# Altium PCB esc.PcbDoc (part 3 of 3)
Units mm, origin at the board's own origin, x right, y up, seen from the top; angles counter-clockwise.
Board outline 31 x 31 mm, 4 copper layers (Top Layer, Ground, Power, Bottom Layer), stack 0.971 mm thick; 336 components, 195 nets, 854 pads, 360 vias.
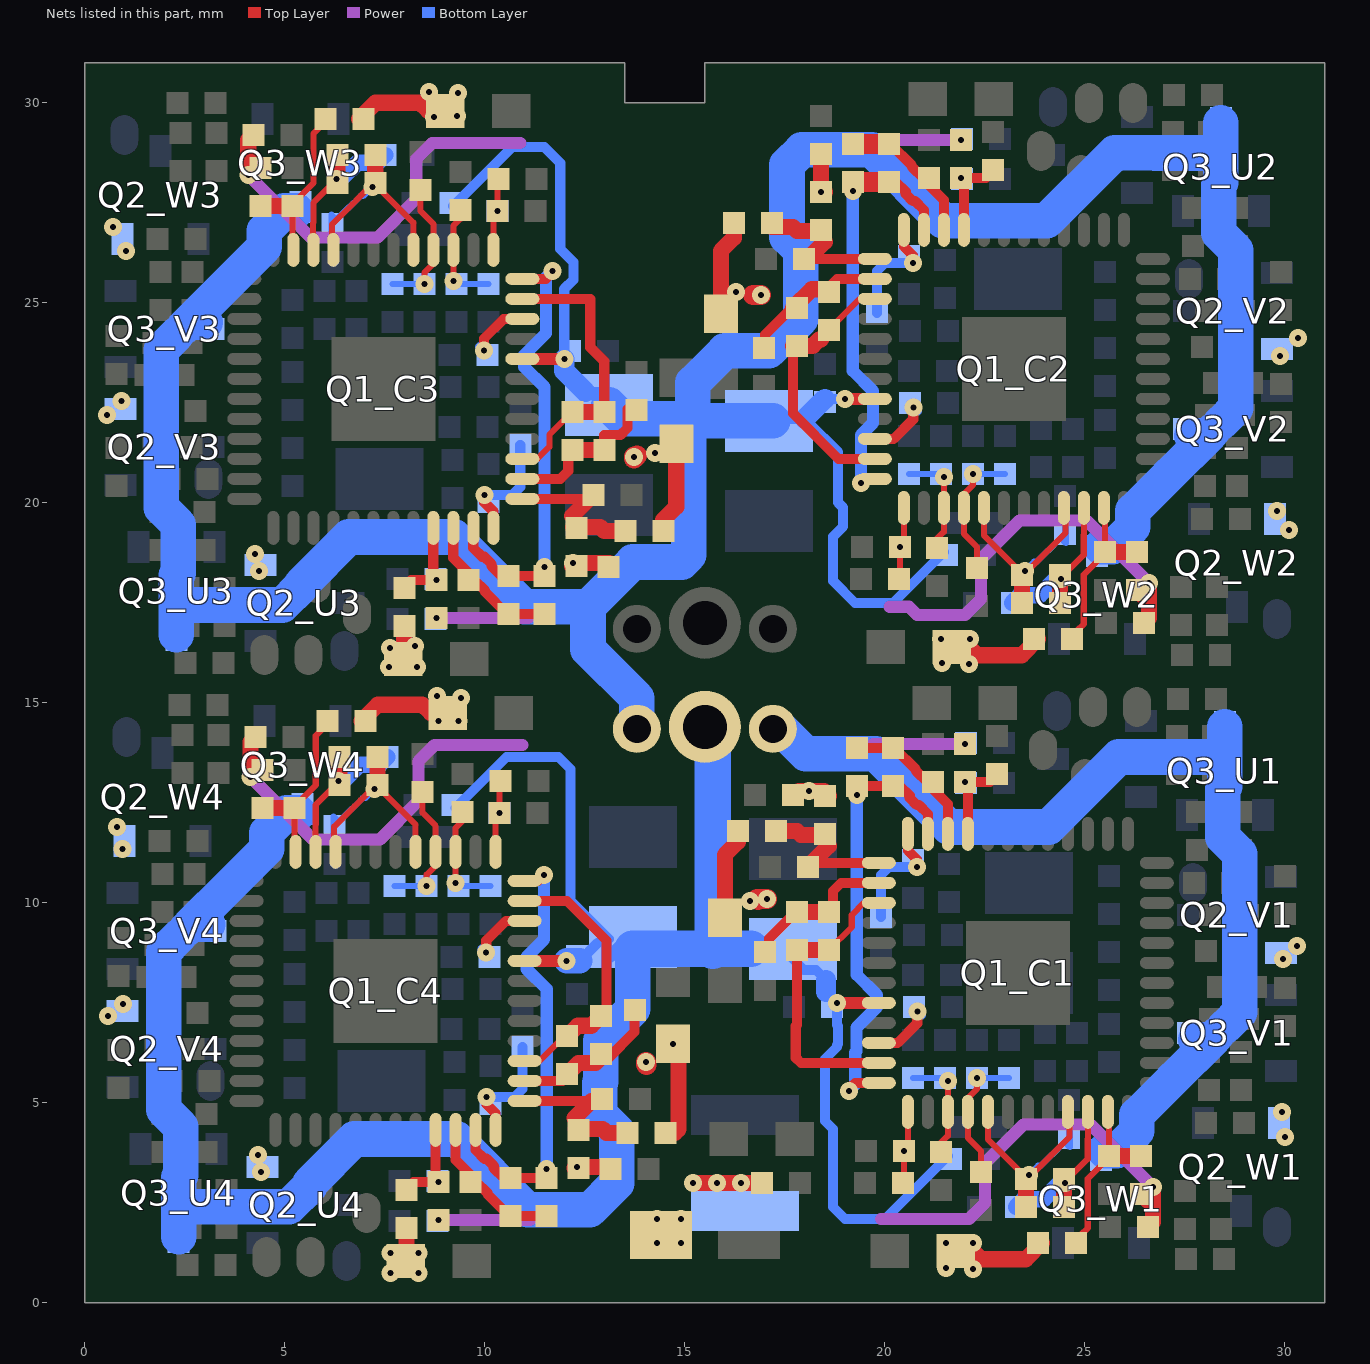
[diagram p5: the nets of this part, all layers, seen from the top]

## Via types
v1: diameter 0.45, hole 0.15, Top Layer to Bottom Layer, tented both sides, 344 vias
v2: diameter 0.5, hole 0.2, Top Layer to Bottom Layer, tented both sides, 12 vias
v3: diameter 0.5, hole 0.2, Top Layer to Bottom Layer, 4 vias

## Nets (pads, with @x,y where several pads share a name; then routed paths per layer and width w, separated by ;. In a path a pad name is that pad's centre, name@x,y a point inside that pad or via, vN(x,y) a via of type N, cw(c..) or ccw(c..) an arc to the next point about the centre after c; other vN are vias at no path point) (continued)
NetQ2_U3_S: Q2_U3.S R5_U3.2 R18_U3.1 | length 0.8
  Top Layer w0.254: R5_U3.2@7.96,16.1 R5_U3.2@7.985,16.125
  Top Layer w0.406: R5_U3.2@7.985,16.125 R18_U3.1@7.985,16.85
  other v1: 7.6,15.9 8.3,15.9 7.625,16.375 8.25,16.425 4.35,18.3 4.25,18.725
NetQ2_U4_S: Q2_U4.S R5_U4.2 R18_U4.1 | length 0.8
  Top Layer w0.254: R5_U4.2@8.016,1.05 R5_U4.2@8.041,1.075
  Top Layer w0.406: R5_U4.2@8.041,1.075 R18_U4.1@8.041,1.8
  other v1: 7.641,0.75 8.341,0.75 7.641,1.25 8.341,1.25 4.4,3.275 4.324,3.699
NetQ2_V1_S: Q2_V1.S R5_V1.2 R18_V1.1 | length 2.6
  Top Layer w0.406: R5_V1.2@16,9.625 16,11.2 16.325,11.525 R18_V1.1@16.325,11.8
  Top Layer w0.508: v1@16.8,10.1 16.825,10.075 16.85,10.1 v1(17.05,10.1)
  other v1: 29.95,8.6 30.3,8.925 16.625,10.05
NetQ2_V2_S: Q2_V2.S R5_V2.2 R18_V2.1 | length 2.5
  Top Layer w0.406: R5_V2.2@15.9,24.725 15.9,26.3 16.225,26.625 R18_V2.1@16.225,26.9
  Top Layer w0.508: v1@16.7,25.2 v1(16.9,25.2)
  other v1: 29.875,23.675 30.325,24.125 16.275,25.275
NetQ2_V3_S: Q2_V3.S R5_V3.2 R18_V3.1 | length 2.5
  Top Layer w0.406: R18_V3.1@14.46,19.3 14.46,19.575 14.785,19.9 R5_V3.2@14.785,21.475
  Top Layer w0.508: v1(13.725,21.15) 13.725,21.11 v1@13.8,21.185
  other v1: 14.25,21.25 0.55,22.2 0.911,22.547
NetQ2_V4_S: Q2_V4.S R5_V4.2 R18_V4.1 | length 2.5
  Top Layer w0.406: R18_V4.1@14.516,4.25 14.75,4.25 14.841,4.341 R5_V4.2@14.841,6.425
  Top Layer w0.508: v1(14.025,6.025) 14.025,5.966 v1@14.041,5.95
  other v1: 14.7,6.475 0.575,7.175 0.948,7.477
NetQ2_W1_S: Q2_W1.S R5_W1.2 R18_W1.1 | length 2.4
  Top Layer w0.406: R5_W1.2@21.775,1.3 22.2,1.3 22.406,1.094 23.519,1.094 R18_W1.1@23.925,1.5
  other v1: 22.2,0.85 21.525,0.875 21.525,1.5 22.2,1.5 30,4.15 29.925,4.775
NetQ2_W2_S: Q2_W2.S R5_W2.2 R18_W2.1 | length 2.4
  Top Layer w0.406: R5_W2.2@21.675,16.4 22.1,16.4 22.306,16.194 23.419,16.194 R18_W2.1@23.825,16.6
  other v1: 22.1,15.975 21.425,16 21.4,16.6 22.125,16.6 30.1,19.325 29.8,19.8
NetQ2_W3_S: Q2_W3.S R5_W3.2 R18_W3.1 | length 2
  Top Layer w0.406: R18_W3.1@6.86,29.6 7.266,30.006 8.379,30.006 R5_W3.2@8.585,29.8
  other v1: 1.025,26.3 0.7,26.9 8.725,29.65 9.3,29.675 9.325,30.25 8.6,30.275
NetQ2_W4_S: Q2_W4.S R5_W4.2 R18_W4.1 | length 2
  Top Layer w0.406: R18_W4.1@6.916,14.55 7.322,14.956 8.435,14.956 R5_W4.2@8.641,14.75
  other v1: 0.941,11.35 0.8,11.9 8.841,14.55 9.341,14.55 9.4,15.125 8.8,15.175
PS1_C1: C2_C1.1 Q1_C1.13 R6_C1.2 R8_C1.2 | length 1.8
  Top Layer w0.152: R8_C1.2@20.45,3 20.475,3.025 v1(20.475,3.8) 20.575,3.9 Q1_C1.13@20.575,4.775
PS1_C2: C2_C2.1 Q1_C2.13 R6_C2.2 R8_C2.2 | length 1.8
  Top Layer w0.152: R8_C2.2@20.35,18.1 20.375,18.125 v1(20.375,18.9) 20.475,19 Q1_C2.13@20.475,19.875
PS1_C3: C2_C3.1 Q1_C3.13 R6_C3.2 R8_C3.2 | length 1.8
  Top Layer w0.152: Q1_C3.13@10.21,26.325 10.21,27.2 v1(10.31,27.3) 10.31,28.075 R8_C3.2@10.335,28.1
PS1_C4: C2_C4.1 Q1_C4.13 R6_C4.2 R8_C4.2 | length 1.8
  Top Layer w0.152: Q1_C4.13@10.266,11.275 10.266,12.15 v1(10.366,12.25) 10.366,13.025 R8_C4.2@10.391,13.05
PS2_C1: C5_C1.2 Q1_C1.15 R9_C1.1 R10_C1.1 | length 2.8
  Top Layer w0.152: R9_C1.1@21.4,3.775 21.4,4 21.575,4.175 Q1_C1.15@21.575,4.775 v1(21.575,5.55)
  Bottom Layer w0.152: C5_C1.2@20.7,5.625 R10_C1.1@21.5,5.625 v1(21.575,5.55)
PS2_C2: C5_C2.2 Q1_C2.15 R9_C2.1 R10_C2.1 | length 2.8
  Top Layer w0.152: R9_C2.1@21.3,18.875 21.3,19.1 21.475,19.275 v1(21.475,20.65)
  Bottom Layer w0.152: C5_C2.2@20.6,20.725 R10_C2.1@21.4,20.725 v1(21.475,20.65)
PS2_C3: C5_C3.2 Q1_C3.15 R9_C3.1 R10_C3.1 | length 2.8
  Top Layer w0.152: v1(9.21,25.55) 9.21,26.925 9.385,27.1 R9_C3.1@9.385,27.325
  Bottom Layer w0.152: v1(9.21,25.55) R10_C3.1@9.285,25.475 C5_C3.2@10.085,25.475
PS2_C4: C5_C4.2 Q1_C4.15 R9_C4.1 R10_C4.1 | length 2.8
  Top Layer w0.152: v1(9.266,10.5) 9.266,11.875 9.441,12.05 R9_C4.1@9.441,12.275
  Bottom Layer w0.152: v1(9.266,10.5) R10_C4.1@9.341,10.425 C5_C4.2@10.141,10.425
PS3_C1: C11_C1.2 Q1_C1.16 R12_C1.1 R13_C1.1 | length 3.6
  Top Layer w0.152: v1@22.3,5.716 v1(22.3,5.625) 22.3,5.346 22.075,5.121 Q1_C1.16@22.075,4.775 22.075,4.125 22.4,3.8 R12_C1.1@22.4,3.275
  Bottom Layer w0.152: C11_C1.2@22.223,5.702 v1(22.3,5.625) R13_C1.1@23.1,5.625
PS3_C2: C11_C2.2 Q1_C2.16 R12_C2.1 R13_C2.1 | length 3.6
  Top Layer w0.152: v1@22.2,20.816 v1(22.2,20.725) 22.2,20.446 21.975,20.221 21.975,19.225 22.3,18.9 R12_C2.1@22.3,18.375
  Bottom Layer w0.152: C11_C2.2@22.123,20.802 v1(22.2,20.725) R13_C2.1@23,20.725
PS3_C3: C11_C3.2 Q1_C3.16 R12_C3.1 R13_C3.1 | length 3.6
  Top Layer w0.152: R12_C3.1@8.385,27.825 8.385,27.3 8.71,26.975 8.71,25.979 8.485,25.754 v1(8.485,25.475) v1@8.485,25.384
  Bottom Layer w0.152: R13_C3.1@7.685,25.475 v1(8.485,25.475) C11_C3.2@8.561,25.398
PS3_C4: C11_C4.2 Q1_C4.16 R12_C4.1 R13_C4.1 | length 3.6
  Top Layer w0.152: R12_C4.1@8.441,12.775 8.441,12.25 8.766,11.925 8.766,10.929 8.541,10.704 v1(8.541,10.425) v1@8.541,10.334
  Bottom Layer w0.152: R13_C4.1@7.741,10.425 v1(8.541,10.425) C11_C4.2@8.618,10.348
SN1_C1: C19_W1.1 Q1_C1.22 R19_W1.2 R20_W1.2 | length 4.2
  Top Layer w0.152: C19_W1.1@24.475,3.1 24.571,3.1 25.071,3.6 25.071,4.094 25.079,4.102 25.079,4.498 25.071,4.506 25.071,4.775 Q1_C1.22@25.075,4.775
  Top Layer w0.406: R20_W1.2@24.475,2.4 C19_W1.1@24.475,3.1
  Bottom Layer w0.406: R19_W1.2@23.275,2.4 23.469,2.594 23.97,2.594 24.376,3 v1(24.5,3)
SN1_C2: C19_W2.1 Q1_C2.22 R19_W2.2 R20_W2.2 | length 4.2
  Top Layer w0.152: C19_W2.1@24.375,18.2 24.471,18.2 24.971,18.7 24.971,19.194 24.979,19.202 24.979,19.598 24.971,19.606 24.971,19.875 Q1_C2.22@24.975,19.875
  Top Layer w0.406: R20_W2.2@24.375,17.5 C19_W2.1@24.375,18.2
  Bottom Layer w0.406: R19_W2.2@23.175,17.5 23.369,17.694 23.87,17.694 24.276,18.1 v1(24.4,18.1)
SN1_C3: C19_W3.1 Q1_C3.22 R19_W3.2 R20_W3.2 | length 4.2
  Top Layer w0.152: Q1_C3.22@5.71,26.325 5.714,26.325 5.714,26.594 5.706,26.602 5.706,26.998 5.714,27.006 5.714,27.5 6.214,28 C19_W3.1@6.31,28
  Top Layer w0.406: C19_W3.1@6.31,28 R20_W3.2@6.31,28.7
  Bottom Layer w0.406: v1(6.285,28.1) 6.409,28.1 6.815,28.506 7.316,28.506 R19_W3.2@7.51,28.7
SN1_C4: C19_W4.1 Q1_C4.22 R19_W4.2 R20_W4.2 | length 4.2
  Top Layer w0.152: Q1_C4.22@5.766,11.275 5.77,11.275 5.77,11.544 5.762,11.552 5.762,11.948 5.77,11.956 5.77,12.45 6.27,12.95 C19_W4.1@6.366,12.95
  Top Layer w0.406: C19_W4.1@6.366,12.95 R20_W4.2@6.366,13.65
  Bottom Layer w0.406: v1(6.341,13.05) 6.466,13.05 6.872,13.456 7.372,13.456 R19_W4.2@7.566,13.65
SN2_C1: C19_V1.1 Q1_C1.2 R19_V1.2 R20_V1.2 | length 3.9
  Top Layer w0.254: R19_V1.2@17.1,8.75 17.1,9.106 17.769,9.775 R20_V1.2@17.8,9.775 ; C19_V1.1@18.7,9.775 18.7,10.3 18.9,10.5 Q1_C1.2@19.85,10.5
  Top Layer w0.406: R20_V1.2@17.8,9.775 C19_V1.1@18.6,9.775
SN2_C2: C19_V2.1 Q1_C2.2 R19_V2.2 R20_V2.2 | length 3.5
  Top Layer w0.254: R19_V2.2@17,23.85 17,24.206 17.669,24.875 R20_V2.2@17.7,24.875 ; C19_V2.1@18.6,25.4 18.8,25.6 Q1_C2.2@19.75,25.6
  Top Layer w0.406: R20_V2.2@17.7,24.875 18.169,25.344 C19_V2.1@18.408,25.344
SN2_C3: C19_V3.1 Q1_C3.2 R19_V3.2 R20_V3.2 | length 4.2
  Top Layer w0.254: Q1_C3.2@10.935,20.6 11.885,20.6 12.085,20.8 C19_V3.1@12.085,21.325 ; R20_V3.2@12.985,21.325 12.985,21.695 13.386,21.695 13.564,21.874 13.564,22.35 R19_V3.2@13.685,22.35
  Top Layer w0.406: C19_V3.1@12.185,21.325 R20_V3.2@12.985,21.325
SN2_C4: C19_V4.1 Q1_C4.2 R19_V4.2 R20_V4.2 | length 3.8
  Top Layer w0.254: Q1_C4.2@10.991,5.55 11.941,5.55 12.141,5.75 C19_V4.1@12.141,5.8 ; R20_V4.2@13.093,6.132 13.741,6.781 R19_V4.2@13.741,7.3
  Top Layer w0.406: C19_V4.1@12.141,5.8 12.341,6 12.766,6 R20_V4.2@13.041,6.275
SN3_C1: C19_U1.1 Q1_C1.46 R19_U1.2 R20_U1.2 | length 3.6
  Top Layer w0.254: C19_U1.1@19.3,13.875 R20_U1.2@20.2,13.875 20.231,13.875 20.78,13.326 20.78,13.295 21.05,13.025 R19_U1.2@21.2,13.025 ; R19_U1.2@21.2,12.925 21.2,12.844 21.575,12.469 Q1_C1.46@21.575,11.725
SN3_C2: C19_U2.1 Q1_C2.46 R19_U2.2 R20_U2.2 | length 3.6
  Top Layer w0.254: R20_U2.2@20.1,28.975 20.131,28.975 20.68,28.426 20.68,28.395 20.95,28.125 R19_U2.2@21.1,28.125 ; R19_U2.2@21.1,28.025 21.1,27.944 21.475,27.569 Q1_C2.46@21.475,26.825
  Top Layer w0.508: C19_U2.1@19.2,28.975 R20_U2.2@20.1,28.975
SN3_C3: C19_U3.1 Q1_C3.46 R19_U3.2 R20_U3.2 | length 3.6
  Top Layer w0.254: Q1_C3.46@9.21,19.375 9.21,18.631 9.585,18.256 R19_U3.2@9.585,18.175 ; R19_U3.2@9.585,18.075 9.735,18.075 10.005,17.805 10.005,17.774 10.554,17.225 R20_U3.2@10.585,17.225 C19_U3.1@11.485,17.225
SN3_C4: C19_U4.1 Q1_C4.46 R19_U4.2 R20_U4.2 | length 3.6
  Top Layer w0.254: Q1_C4.46@9.266,4.325 9.266,3.581 9.641,3.206 R19_U4.2@9.641,3.125 ; R19_U4.2@9.641,3.025 9.791,3.025 10.062,2.755 10.062,2.724 10.61,2.175 R20_U4.2@10.641,2.175 C19_U4.1@11.541,2.175
SO1_C1: C19_W1.2 Q1_C1.17 Q1_C1.21 R15_C1.1 R20_W1.1 | length 6.8
  Top Layer w0.152: Q1_C1.17@22.575,4.775 22.575,4.092 C19_W1.2@23.525,3.142 ; C19_W1.2@23.525,3.1 23.566,3.1 23.946,3.48 24.095,3.629 24.61,4.145 24.61,4.653 24.557,4.707 24.6,4.75 Q1_C1.21@24.575,4.775
  Top Layer w0.406: R20_W1.1@23.525,2.4 C19_W1.2@23.525,3.1
  Bottom Layer w0.152: v1(23.6,3.2) 23.829,3.429 23.895,3.429 24.175,3.709 24.184,3.709 24.498,4.023 24.625,3.896 R15_C1.1@24.625,4.325
SO1_C2: C19_W2.2 Q1_C2.17 Q1_C2.21 R15_C2.1 R20_W2.1 | length 6.8
  Top Layer w0.152: Q1_C2.17@22.475,19.875 22.475,19.192 C19_W2.2@23.425,18.242 ; C19_W2.2@23.425,18.2 23.466,18.2 23.846,18.58 23.995,18.729 24.51,19.245 24.51,19.753 24.457,19.807 24.5,19.85 Q1_C2.21@24.475,19.875
  Top Layer w0.406: R20_W2.1@23.425,17.5 C19_W2.2@23.425,18.2
  Bottom Layer w0.152: v1(23.5,18.3) 23.729,18.529 23.795,18.529 24.075,18.809 24.084,18.809 24.398,19.123 24.525,18.996 R15_C2.1@24.525,19.425
SO1_C3: C19_W3.2 Q1_C3.17 Q1_C3.21 R15_C3.1 R20_W3.1 | length 6.8
  Top Layer w0.152: Q1_C3.21@6.21,26.325 6.185,26.35 6.228,26.393 6.174,26.447 6.174,26.955 6.69,27.471 6.839,27.62 7.219,28 C19_W3.2@7.26,28 ; C19_W3.2@7.26,27.958 8.21,27.008 Q1_C3.17@8.21,26.325
  Top Layer w0.406: C19_W3.2@7.26,28 R20_W3.1@7.26,28.7
  Bottom Layer w0.152: R15_C3.1@6.16,26.775 6.16,27.204 6.287,27.077 6.6,27.391 6.609,27.391 6.89,27.671 6.956,27.671 v1(7.185,27.9)
SO1_C4: C19_W4.2 Q1_C4.17 Q1_C4.21 R15_C4.1 R20_W4.1 | length 6.8
  Top Layer w0.152: Q1_C4.21@6.266,11.275 6.241,11.3 6.285,11.343 6.231,11.397 6.231,11.905 6.747,12.421 6.895,12.57 7.276,12.95 C19_W4.2@7.316,12.95 ; C19_W4.2@7.316,12.908 8.266,11.958 Q1_C4.17@8.266,11.275
  Top Layer w0.406: C19_W4.2@7.316,12.95 R20_W4.1@7.316,13.65
  Bottom Layer w0.152: R15_C4.1@6.216,11.725 6.216,12.154 6.343,12.027 6.657,12.341 6.666,12.341 6.947,12.621 7.013,12.621 v1(7.241,12.85)
SO2_C1: C19_V1.2 Q1_C1.3 Q1_C1.11 R20_V1.1 | length 7.6
  Top Layer w0.152: C19_V1.2@18.6,8.825 19.171,9.396 19.171,9.696 19.475,10 Q1_C1.3@19.85,10
  Top Layer w0.254: R20_V1.1@17.8,8.825 17.8,6.949 17.77,6.919 17.77,6.13 17.9,6 Q1_C1.11@19.85,6
  Top Layer w0.406: R20_V1.1@17.8,8.825 C19_V1.2@18.6,8.825
SO2_C2: C19_V2.2 Q1_C2.3 Q1_C2.11 R20_V2.1 | length 6.5
  Top Layer w0.152: C19_V2.2@18.55,24.275 19.375,25.1 Q1_C2.3@19.75,25.1 ; C19_V2.2@18.7,24.5 C19_V2.2@18.704,24.496
  Top Layer w0.254: R20_V2.1@17.7,23.925 17.7,22.239 18.839,21.1 Q1_C2.11@19.75,21.1
  Top Layer w0.406: R20_V2.1@17.7,23.925 R20_V2.1@17.8,23.925 18.193,23.925 18.349,24.081 18.381,24.081 C19_V2.2@18.407,24.107
SO2_C3: C19_V3.2 Q1_C3.3 Q1_C3.11 R20_V3.1 | length 7.4
  Top Layer w0.152: Q1_C3.3@10.935,21.1 11.31,21.1 11.614,21.404 11.614,21.704 C19_V3.2@12.185,22.275
  Top Layer w0.254: Q1_C3.11@10.935,25.1 12.634,25.1 12.634,23.894 12.985,23.543 R20_V3.1@12.985,22.275
  Top Layer w0.406: C19_V3.2@12.185,22.275 R20_V3.1@12.985,22.275
SO2_C4: C19_V4.2 Q1_C4.3 Q1_C4.11 R20_V4.1 | length 6.4
  Top Layer w0.152: Q1_C4.3@10.991,6.05 11.367,6.05 C19_V4.2@11.967,6.65
  Top Layer w0.254: Q1_C4.11@10.991,10.05 12.05,10.05 13.041,9.059 R20_V4.1@13.041,7.316
  Top Layer w0.406: C19_V4.2@12.141,6.75 12.322,6.931 12.656,6.931 R20_V4.1@12.9,7.175
SO3_C1: C19_U1.2 Q1_C1.12 Q1_C1.47 R20_U1.1 | length 11.2
  Top Layer w0.254: v1@19.198,5.438 19.26,5.5 Q1_C1.12@19.85,5.5 ; C19_U1.2@19.3,12.925 R20_U1.1@20.2,12.925 20.375,12.925 20.62,12.68 20.62,12.624 20.799,12.445 20.855,12.445 21.075,12.225 Q1_C1.47@21.075,11.725
  Bottom Layer w0.305: v1(19.1,5.3) 19.257,5.457 19.257,6.261 19.287,6.291 19.287,6.887 19.8,7.4 19.8,7.7 19.295,8.205 19.295,12.695 v1(19.3,12.7)
SO3_C2: C19_U2.2 Q1_C2.12 Q1_C2.47 R20_U2.1 | length 10.4
  Top Layer w0.254: Q1_C2.12@19.4,20.6 Q1_C2.12@19.75,20.6 ; R20_U2.1@20.1,28.025 20.275,28.025 20.52,27.78 20.52,27.724 20.699,27.545 20.755,27.545 20.975,27.325 Q1_C2.47@20.975,26.825
  Top Layer w0.508: C19_U2.2@19.2,28.025 R20_U2.1@20.1,28.025
  Bottom Layer w0.305: v1(19.2,27.8) 19.195,27.795 19.195,23.305 19.7,22.8 19.7,22 19.4,21.7 v1@19.4,20.686
  other v1: 19.4,20.5
SO3_C3: C19_U3.2 Q1_C3.12 Q1_C3.47 R20_U3.1 | length 11.2
  Top Layer w0.254: Q1_C3.47@9.71,19.375 9.71,18.875 9.93,18.655 9.986,18.655 10.164,18.476 10.164,18.42 10.41,18.175 R20_U3.1@10.585,18.175 C19_U3.2@11.485,18.175 ; Q1_C3.12@10.935,25.6 11.525,25.6 v1@11.586,25.662
  Bottom Layer w0.305: v1(11.485,18.4) 11.49,18.405 11.49,22.895 10.985,23.4 10.985,23.7 11.527,24.243 11.527,25.643 v1(11.685,25.8)
SO3_C4: C19_U4.2 Q1_C4.12 Q1_C4.47 R20_U4.1 | length 10.8
  Top Layer w0.254: Q1_C4.47@9.766,4.325 9.766,3.825 9.987,3.605 10.043,3.605 10.221,3.426 10.221,3.37 10.466,3.125 R20_U4.1@10.641,3.125 C19_U4.2@11.541,3.125 ; Q1_C4.12@10.991,10.55 11.327,10.55 Q1_C4.12@11.389,10.612
  Bottom Layer w0.305: v1(11.477,10.7) 11.477,9.086 11.041,8.65 11.041,8.35 11.547,7.845 11.547,3.355 v1(11.541,3.35)
SP1_C1: C17_W1.1 Q1_C1.23 R17_W1.1 R18_W1.2 | length 4.6
  Top Layer w0.152: R18_W1.2@24.875,1.3 24.9,1.325 24.9,1.7 25.071,1.871 25.071,3.105 25.6,3.634 C17_W1.1@25.6,3.675 25.6,4.75 Q1_C1.23@25.575,4.775
  Top Layer w0.406: C17_W1.1@25.6,3.675 R17_W1.1@26.4,3.675
SP1_C2: C17_W2.1 Q1_C2.23 R17_W2.1 R18_W2.2 | length 4.6
  Top Layer w0.152: R18_W2.2@24.775,16.4 24.8,16.425 24.8,16.8 24.971,16.971 24.971,18.205 25.5,18.734 C17_W2.1@25.5,18.775 25.5,19.85 Q1_C2.23@25.475,19.875
  Top Layer w0.406: C17_W2.1@25.5,18.775 R17_W2.1@26.3,18.775
SP1_C3: C17_W3.1 Q1_C3.23 R17_W3.1 R18_W3.2 | length 4.6
  Top Layer w0.152: Q1_C3.23@5.21,26.325 5.185,26.35 C17_W3.1@5.185,27.425 5.185,27.466 5.714,27.995 5.714,29.229 5.885,29.4 5.885,29.775 R18_W3.2@5.91,29.8
  Top Layer w0.406: R17_W3.1@4.385,27.425 C17_W3.1@5.185,27.425
SP1_C4: C17_W4.1 Q1_C4.23 R17_W4.1 R18_W4.2 | length 4.6
  Top Layer w0.152: Q1_C4.23@5.266,11.275 5.241,11.3 C17_W4.1@5.241,12.375 5.241,12.416 5.77,12.945 5.77,14.179 5.941,14.35 5.941,14.725 R18_W4.2@5.966,14.75
  Top Layer w0.406: R17_W4.1@4.441,12.375 C17_W4.1@5.241,12.375
SP2_C1: C17_V1.1 Q1_C1.1 R17_V1.1 R18_V1.2 | length 4.1
  Top Layer w0.152: R17_V1.1@18.575,11.7 18.6,11.725 18.6,11.425
  Top Layer w0.254: C17_V1.1@18.075,10.9 18.175,11 Q1_C1.1@19.85,11
  Top Layer w0.406: R18_V1.2@17.275,11.8 17.8,11.8 17.9,11.7 R17_V1.1@18.575,11.7 ; C17_V1.1@18.175,11 18.6,11.425
SP2_C2: C17_V2.1 Q1_C2.1 R17_V2.1 R18_V2.2 | length 4.1
  Top Layer w0.152: R17_V2.1@18.475,26.8 18.5,26.825 18.5,26.525
  Top Layer w0.254: C17_V2.1@17.975,26 18.075,26.1 Q1_C2.1@19.75,26.1
  Top Layer w0.406: R18_V2.2@17.175,26.9 17.7,26.9 17.8,26.8 R17_V2.1@18.475,26.8 ; C17_V2.1@18.075,26.1 18.5,26.525
SP2_C3: C17_V3.1 Q1_C3.1 R17_V3.1 R18_V3.2 | length 4.1
  Top Layer w0.152: 12.185,19.675 12.185,19.375 R17_V3.1@12.21,19.4
  Top Layer w0.254: Q1_C3.1@10.935,20.1 12.61,20.1 C17_V3.1@12.71,20.2
  Top Layer w0.406: 12.185,19.675 C17_V3.1@12.61,20.1 ; R17_V3.1@12.21,19.4 12.885,19.4 12.985,19.3 R18_V3.2@13.51,19.3
SP2_C4: C17_V4.1 Q1_C4.1 R17_V4.1 R18_V4.2 | length 4.1
  Top Layer w0.152: 12.241,4.625 12.241,4.325 R17_V4.1@12.266,4.35
  Top Layer w0.254: Q1_C4.1@10.991,5.05 12.666,5.05 C17_V4.1@12.766,5.15
  Top Layer w0.406: 12.241,4.625 C17_V4.1@12.666,5.05 ; R17_V4.1@12.266,4.35 12.941,4.35 13.041,4.25 R18_V4.2@13.566,4.25
SP3_C1: C17_U1.1 Q1_C1.45 R17_U1.1 R18_U1.2 | length 2.3
  Top Layer w0.254: Q1_C1.45@22.075,11.725 22.075,12.95 v1(22,13.025) 22.625,13.025 22.8,13.2 R18_U1.2@22.8,13.225 R18_U1.2@22.8,13.3
SP3_C2: C17_U2.1 Q1_C2.45 R17_U2.1 R18_U2.2 | length 2.3
  Top Layer w0.254: Q1_C2.45@21.975,26.825 21.975,28.05 v1(21.9,28.125) 22.525,28.125 22.7,28.3 R18_U2.2@22.7,28.325 R18_U2.2@22.7,28.4
SP3_C3: C17_U3.1 Q1_C3.45 R17_U3.1 R18_U3.2 | length 2.3
  Top Layer w0.254: R18_U3.2@7.985,17.8 R18_U3.2@7.985,17.875 7.985,17.9 8.16,18.075 v1(8.785,18.075) 8.71,18.15 Q1_C3.45@8.71,19.375
SP3_C4: C17_U4.1 Q1_C4.45 R17_U4.1 R18_U4.2 | length 2.3
  Top Layer w0.254: R18_U4.2@8.041,2.75 R18_U4.2@8.041,2.825 8.041,2.85 8.216,3.025 v1(8.841,3.025) 8.766,3.1 Q1_C4.45@8.766,4.325
VBUS: 12V.1 C12_C1.1 C12_C2.1 C12_C3.1 C12_C4.1 C13_C1.1 C13_C2.1 C13_C3.1 C13_C4.1 C21.1 C22.1 Q1_C1.8 Q1_C2.8 Q1_C3.8 Q1_C4.8 Q3_U1.D Q3_U2.D Q3_U3.D Q3_U4.D Q3_V1.D Q3_V2.D Q3_V3.D Q3_V4.D Q3_W1.D Q3_W2.D Q3_W3.D Q3_W4.D R14_C1.2 R14_C2.2 R14_C3.2 R14_C4.2 | length 182.1
  Top Layer w0.305: Q1_C3.8@10.935,23.6 v1(11.985,23.6) ; Q1_C4.8@10.991,8.55 v1(12.041,8.55) ; v1(18.8,7.5) Q1_C1.8@19.85,7.5 ; v1(19,22.6) Q1_C2.8@19.75,22.6
  Top Layer w0.406: 12V.1@15.5,14.4 12V.1@15.6,14.3
  Power w0.406: C21.1@13.6,14.3 C21.1@13.6,14.7 ; C22.1@17.45,14.3 C22.1@17.45,14.55
  Bottom Layer w0.254: R14_C3.2@9.21,27.425 10.685,28.9 11.485,28.9 11.885,28.5 11.885,26.349 12.214,26.019 12.214,25.581 11.985,25.351 v1(11.985,23.6) ; R14_C4.2@9.266,12.375 10.541,13.65 11.841,13.65 12.141,13.35 12.141,11.95 12.141,10.059 C13_C4.1@13.1,9.1 ; C12_C4.1@12.37,8.55 C13_C4.1@12.81,8.99 ; C13_C3.1@12.51,22.775 12.81,22.775 C13_C3.1@13.085,22.5 ; C13_C2.1@17.225,22.1 C13_C2.1@18,22.1 ; C13_C1.1@17.7,8.6 17.975,8.325 18.275,8.325 18.525,8.075 ; C13_C2.1@18.088,22.013 18.83,21.27 18.83,20.008 18.955,19.883 18.955,19.411 18.7,19.156 18.7,18.051 19.251,17.5 20.2,17.5 R14_C2.2@21.475,18.775 ; C12_C2.1@18.5,22.6 v1(19,22.6) ; 18.525,7.775 v1(18.8,7.5) 18.8,6.949 18.83,6.919 18.83,6.481 18.8,6.451 18.8,6.4 18.5,6.1 18.5,4.549 18.7,4.349 18.7,2.4 19,2.1 20,2.1 R14_C1.2@21.575,3.675
  Bottom Layer w0.305: C13_C4.1@13.116,8.65 C13_C4.1@13.516,9.05
  Bottom Layer w0.508: v1(11.985,23.6) 11.985,23.3 C13_C3.1@12.51,22.775 ; C13_C2.1@18,22.1 C12_C2.1@18.5,22.6 ; 18.525,7.775 18.525,8.075
  Bottom Layer w0.635: v1(12.041,8.55) C12_C4.1@12.37,8.55
  Bottom Layer w0.889: Q3_U3.D@2.285,16.7 2.285,17.5 ; 2.285,24.2 1.912,23.828 1.912,19.877 2.337,19.452 2.337,18.242 2.285,18.19 2.285,17.5 ; Q3_U4.D@2.341,1.65 2.341,2.45 ; 2.341,9.15 1.969,8.778 1.969,4.827 2.394,4.402 2.394,3.192 2.341,3.14 2.341,2.45 ; 2.485,24.4 2.604,24.52 ; 2.541,9.35 2.661,9.47 ; Q3_V3.D@3.012,24.52 2.604,24.52 ; Q3_V4.D@3.069,9.47 2.661,9.47 ; Q3_W3.D@5.285,27.3 4.985,27.3 4.485,26.8 4.485,26.4 3.585,25.5 2.604,24.52 ; Q3_W4.D@5.341,12.25 5.041,12.25 4.541,11.75 4.541,11.35 3.641,10.45 2.661,9.47 ; C13_C3.1@13.1,22.45 13.45,22.1 14.8,22.1 ; C13_C4.1@13.7,8.85 13.7,7.35 12.9,6.55 12.9,5.532 12.869,5.501 12.869,4.799 12.9,4.768 12.9,4.7 13.3,4.3 13.3,3.707 13.294,3.701 13.294,2.999 13.297,2.997 12.625,2.325 11.066,2.325 9.294,4.097 6.734,4.097 5.619,2.983 5.619,2.919 5.103,2.403 2.389,2.403 2.341,2.45 ; C21.1@13.8,14.35 13.8,15.121 12.578,16.344 12.578,17.4 ; 15.1,21.9 15.1,18.7 14.922,18.522 13.7,18.522 12.578,17.4 ; 15.2,22 15.2,23 16,23.8 17.1,23.8 17.9,24.6 17.9,26.3 17.553,26.647 17.553,28.453 17.925,28.825 19.675,28.825 21.447,27.053 24.048,27.053 25.742,28.747 25.874,28.747 25.879,28.753 26.747,28.753 26.752,28.747 28.353,28.747 28.4,28.7 ; 15.25,22.05 C13_C2.1@17.1,22.05 C13_C2.1@17.2,22.05 ; C22.1@17.45,14.3 18.025,13.725 19.775,13.725 21.603,11.897 24.092,11.897 25.842,13.647 28.453,13.647 28.5,13.6 ; Q3_W2.D@25.4,18.9 25.7,18.9 26.2,19.4 26.2,19.8 27.1,20.7 28.08,21.68 ; Q3_W1.D@25.5,3.8 25.8,3.8 26.3,4.3 26.3,4.7 27.2,5.6 28.18,6.58 ; Q3_V2.D@27.672,21.68 28.08,21.68 ; Q3_V1.D@27.772,6.58 28.18,6.58 ; 28.2,21.8 28.08,21.68 ; 28.3,6.7 28.18,6.58 ; 28.4,22 28.773,22.373 28.773,26.322 28.347,26.748 28.347,27.958 28.4,28.01 28.4,28.7 ; Q3_U2.D@28.4,29.5 28.4,28.7 ; 28.5,6.9 28.872,7.272 28.872,11.223 28.447,11.648 28.447,12.858 28.5,12.91 28.5,13.6 ; Q3_U1.D@28.5,14.4 28.5,13.6 ; 2.285,17.5 2.337,17.447 4.937,17.447 5.407,17.917 5.407,17.957 6.597,19.147 9.237,19.147 10.985,17.4 12.578,17.4
  Bottom Layer w0.914: C13_C4.1@13.7,8.85 15.7,8.85 ; 12V.1@15.5,14.4 15.7,14.2 15.7,8.85 ; 15.7,8.8 15.7,8.85 ; C13_C1.1@16.65,8.85 15.7,8.85
VDD: C1_C1.2 C1_C2.2 C1_C3.2 C1_C4.2 C10_C1.1 C10_C2.1 C10_C3.1 C10_C4.1 C18_U1.2 C18_U2.2 C18_U3.2 C18_U4.2 C18_V1.2 C18_V2.2 C18_V3.2 C18_V4.2 C18_W1.2 C18_W2.2 C18_W3.2 C18_W4.2 C20.1 C23.2 L1.1 Q1_C1.10 Q1_C1.48 Q1_C2.10 Q1_C2.48 Q1_C3.10 Q1_C3.48 Q1_C4.10 Q1_C4.48 R11_C1.1 R11_C2.1 R11_C3.1 R11_C4.1 R17_U1.2 R17_U2.2 R17_U3.2 R17_U4.2 R17_V1.2 R17_V2.2 R17_V3.2 R17_V4.2 R17_W1.2 R17_W2.2 R17_W3.2 R17_W4.2 | length 75.9
  Top Layer w0.254: v1(9.976,23.809) 9.976,24.109 10.467,24.6 Q1_C3.10@10.935,24.6 ; v1(9.985,20.2) 9.985,20.018 10.21,19.793 Q1_C3.48@10.21,19.375 ; v1(10.033,8.759) 10.033,9.059 10.524,9.55 Q1_C4.10@10.991,9.55 ; v1(10.041,5.15) 10.041,4.968 10.266,4.743 Q1_C4.48@10.266,4.325 ; Q1_C2.10@19.75,21.6 20.217,21.6 20.709,22.091 v1(20.709,22.391) ; Q1_C1.10@19.85,6.5 20.317,6.5 20.809,6.991 v1(20.809,7.291) ; Q1_C2.48@20.475,26.825 20.475,26.407 20.7,26.182 v1(20.7,26) ; Q1_C1.48@20.575,11.725 20.575,11.307 20.8,11.082 v1(20.8,10.9)
  Top Layer w0.406: C18_W3.2@4.085,29.075 C18_W3.2@4.21,29.2 ; v1(4.085,28.2) 4.085,28.425 ; C18_W3.2@4.085,29.075 4.085,28.425 ; v1(4.141,13.15) 4.141,13.375 ; C18_W4.2@4.266,14.15 4.141,14.025 4.141,13.375 ; R17_W3.2@4.385,28.375 4.21,28.55 4.085,28.425 ; R17_W4.2@4.441,13.325 4.266,13.5 4.141,13.375 ; R17_V3.2@12.185,18.425 12.2,18.41 v1(12.2,18.5) C18_V3.2@13.1,18.5 ; R17_V4.2@12.241,3.375 12.3,3.316 v1(12.3,3.4) 12.841,3.4 ; C18_V4.2@13.116,3.375 C18_V4.2@13.141,3.35 ; v1(15.2,3) v1(15.8,3) v1(16.4,3) C23.2@16.925,3 ; C18_V1.2@17.7,12.7 17.725,12.675 17.85,12.8 v1(18.1,12.8) 18.475,12.8 R17_V1.2@18.6,12.675 ; v1(18.4,27.775) R17_V2.2@18.4,27.875 ; C18_V2.2@18.4,28.725 R17_V2.2@18.4,27.875 ; R17_V2.2@18.5,27.775 R17_V2.2@18.4,27.875 ; R17_W2.2@26.3,17.825 26.475,17.65 26.6,17.775 ; R17_W1.2@26.4,2.725 26.575,2.55 26.7,2.675 ; C18_W2.2@26.475,17 26.6,17.125 26.6,17.775 ; C18_W1.2@26.575,1.9 26.7,2.025 26.7,2.675 ; v1(26.6,18) 26.6,17.775 ; v1(26.7,2.9) 26.7,2.675
  Power w0.305: v1(4.085,28.2) 5.648,26.637 7.318,26.637 8.285,27.603 8.285,28.6 8.685,29 10.885,29 ; v1(4.141,13.15) 5.704,11.587 7.375,11.587 8.341,12.553 8.341,13.55 8.741,13.95 10.941,13.95 ; v1(8.785,17.125) 11.085,17.125 ; v1(8.841,2.075) 11.141,2.075 ; 19.6,29.075 v1(21.9,29.075) ; 19.7,13.975 v1(22,13.975) ; 19.9,2.1 22.1,2.1 22.5,2.5 22.5,3.497 23.466,4.463 25.137,4.463 v1(26.7,2.9) ; 20.12,17.405 20.605,17.405 20.81,17.2 22,17.2 22.4,17.6 22.4,18.597 23.366,19.563 25.037,19.563 v1(26.6,18)
  Bottom Layer w0.254: C10_C3.1@9.885,23.9 v1(9.976,23.809) ; C10_C4.1@9.941,8.85 v1(10.033,8.759) ; v1(9.985,20.2) 10.685,20.2 10.885,20.4 R11_C3.1@10.885,21.45 ; v1(10.041,5.15) 10.741,5.15 10.941,5.35 R11_C4.1@10.941,6.4 ; v1(14.3,1.5) v1(14.3,2.1) ; v1(14.9,1.5) v1(14.9,2.1) ; R11_C2.1@19.8,24.75 R11_C2.1@19.8,24.775 19.8,25.8 20,26 v1(20.7,26) ; R11_C1.1@19.9,9.65 19.9,10.7 20.1,10.9 v1(20.8,10.9) ; v1(20.709,22.391) C10_C2.1@20.8,22.3 ; v1(20.809,7.291) C10_C1.1@20.9,7.2
pads on no net: Q1_C1.4 Q1_C1.5 Q1_C1.14 Q1_C1.18 Q1_C1.40 Q1_C1.41 Q1_C1.43 Q1_C2.4 Q1_C2.5 Q1_C2.14 Q1_C2.18 Q1_C2.40 Q1_C2.41 Q1_C2.43 Q1_C3.4 Q1_C3.5 Q1_C3.14 Q1_C3.18 Q1_C3.40 Q1_C3.41 Q1_C3.43 Q1_C4.4 Q1_C4.5 Q1_C4.14 Q1_C4.18 Q1_C4.40 Q1_C4.41 Q1_C4.43

## Polygon pours and split planes (outlines as drawn)
GND on Ground "Ground" (solid, remove dead copper, pour order 114): 15.5,15.9 21.548,15.9 24.802,12.198 24.802,5.8 26.557,5.3 26.557,2.9 26.108,2.592 25.337,2.592 25.1,3.1 23.1,3.1 21.4,4.8 21.4,6.4 21.062,6.4 20.358,7.104 20.4,7.147 20.4,8.8 19.9,8.8 17.95,10.75 17.1,10.7 16.4,10.7 16.4,9.4 17.3,9.4 19.2,7.791 19.2,3.6 21.1,1.7 21.1,0.5 15.5,0.5
NetQ2_W1_S on Ground "Ground-W1" (solid, remove dead copper, pour order 102): 21.1,1.8 27.453,1.8 29.1,5.3 30.5,5.3 30.5,0.5 21.1,0.5
NetQ2_W4_S on Ground "Ground-W1" (solid, remove dead copper, pour order 100): 9.741,14.2 3.365,14.2 1.741,10.75 0.5,10.75 0.5,15.55 9.741,15.55
GND on Ground "Ground" (solid, remove dead copper, pour order 113): 15.765,0.5 8.985,0.5 6.04,3.852 6.04,10.25 4.285,10.75 4.285,13.15 4.734,13.458 5.504,13.458 5.741,12.95 7.741,12.95 9.441,11.25 9.441,9.65 9.78,9.65 10.484,8.946 10.441,8.903 10.441,7.25 10.941,7.25 12.891,5.3 13.741,5.35 14.441,5.35 14.441,6.65 13.541,6.65 11.838,8.146 11.838,9.65 11.838,12.95 10,14.4 10,15.83 15.7,15.7
GND on Ground "Ground" (solid, remove dead copper, pour order 112): 20.781,15.6 8.885,15.6 5.983,18.902 5.983,25.3 4.228,25.8 4.228,28.2 4.677,28.508 5.447,28.508 5.685,28 7.685,28 9.385,26.3 9.385,24.7 9.723,24.7 10.427,23.996 10.385,23.953 10.385,22.3 10.885,22.3 12.835,20.35 13.685,20.4 14.385,20.4 14.385,21.7 13.485,21.7 11.781,23.196 11.781,24.7 11.781,27.096 10,29 10,30.5 15.7,30.5 15.7,24.45 18.641,22.3 18.641,20.1 18.641,19.764 20.781,17.476
GND on Ground "Ground" (solid, remove dead copper, pour order 111): 15.4,30.5 21.888,30.5 24.702,27.298 24.702,20.9 26.457,20.4 26.457,18 26.008,17.692 25.237,17.692 25,18.2 23,18.2 21.3,19.9 21.3,21.5 20.962,21.5 20.258,22.204 20.3,22.247 20.3,23.9 19.8,23.9 17.85,25.85 17,25.8 16.3,25.8 16.3,24.5 17.2,24.5 19.1,22.891 19.1,21.8 17.2,21.8 16.3,21.8 15.4,21.8
NetQ2_U2_S on Ground "Ground-U1" (solid, remove dead copper, pour order 87): 22.2,30.6 22.3,30.5 30.3,30.5 30.3,27.3 30.1,27.2 30,27.2 24.8,27.2 22.4,29.6 22.2,29.6
NetQ2_W2_S on Ground "Ground-W1" (solid, remove dead copper, pour order 99): 21,17 27.4,17 29,20.4 30.4,20.4 30.4,15.6 21,15.6
NetQ2_V2_S on Ground "Ground-V1" (solid, remove dead copper, pour order 95): 16.4,25.579 17.821,25.579 20.413,23.5 20.413,21.787 21.3,20.9 21.3,19.6 22.8,18.1 22.8,18 26.457,18 26.457,19.4 28.2,24.3 30.4,24.3 30.4,23.1 29.7,22.1 27.357,17.1 23.5,17.1 20.8,17.1 20.8,17.4 19.3,18.9 19.3,19.6 18.9,20 18.9,23.1 18.9,23.3 17.35,24.65 16.4,24.65
NetQ2_W3_S on Ground "Ground-W1" (solid, remove dead copper, pour order 101): 9.685,29.4 3.379,29.4 1.685,25.8 0.5,25.8 0.5,30.5 9.685,30.5
NetQ2_V3_S on Ground "Ground-V1" (solid, remove dead copper, pour order 97): 14.4,20.621 12.864,20.621 10.271,22.7 10.271,24.413 9.385,25.3 9.385,26.6 7.885,28.1 7.885,28.2 4.228,28.2 4.228,26.8 2.485,21.9 0.5,21.9 0.5,23.408 0.985,24.1 3.328,29.1 7.185,29.1 9.885,29.1 9.885,28.8 11.385,27.3 11.385,26.6 11.785,26.2 11.785,23.1 11.785,22.9 13.335,21.55 14.4,21.55
NetQ2_V1_S on Ground "Ground-V1" (solid, remove dead copper, pour order 98): 16.5,10.479 17.921,10.479 20.513,8.4 20.513,6.687 21.4,5.8 21.4,4.5 22.9,3 22.9,2.9 26.557,2.9 26.557,4.3 28.3,9.2 30.5,9.2 30.5,8 29.8,7 27.457,2 23.6,2 20.9,2 20.9,2.3 19.4,3.8 19.4,4.5 19,4.9 19,8 19,8.2 17.45,9.55 16.5,9.55
NetQ2_U4_S on Ground "Ground-U1" (solid, remove dead copper, pour order 88): 8.541,0.5 0.5,0.5 0.5,3.879 0.641,3.95 0.741,3.95 5.941,3.95 8.341,1.55 8.541,1.55
NetQ2_U1_S on Ground "Ground-U1" (solid, remove dead copper, pour order 90): 22.3,15.5 22.4,15.4 30.4,15.4 30.4,12.2 30.2,12.1 30.1,12.1 24.9,12.1 22.5,14.5 22.3,14.5
NetQ2_V4_S on Ground "Ground-V1" (solid, remove dead copper, pour order 96): 14.341,5.571 12.921,5.571 10.328,7.65 10.328,9.363 9.441,10.25 9.441,11.55 7.941,13.05 7.941,13.15 4.285,13.15 4.285,11.75 2.541,6.85 0.5,6.85 0.5,8.276 1.041,9.05 3.385,14.05 7.241,14.05 9.941,14.05 9.941,13.75 11.441,12.25 11.441,11.55 11.841,11.15 11.841,8.05 11.841,7.85 13.391,6.5 14.341,6.5
NetQ2_U3_S on Ground "Ground-U1" (solid, remove dead copper, pour order 89): 8.485,15.6 8.385,15.7 0.5,15.7 0.5,19 0.685,19 5.885,19 8.285,16.6 8.485,16.6
VDD on Power "Power-No Net" (solid, remove dead copper, pour order 118): 15.5,15.7 21.2,15.7 21.2,11.1 21.2,2 19.6,2 19.3,1.7 19.3,0.6 13.6,0.6 13.5,0.5 13.5,6 15.5,8
VDD on Power "Power-No Net" (solid, remove dead copper, pour order 117): 12.924,0.5 9.641,0.5 9.641,4.95 9.641,14.05 10.941,14.05 10.941,15.6 15.979,15.6 15.979,6.589 14.4,0.5
VDD on Power "Power-No Net" (solid, remove dead copper, pour order 116): 12.6,15.142 9.585,15.142 9.585,20 9.585,29.2 11.408,29.2 11.508,30.5 15.642,30.5 15.642,19.4 15.642,15.142
VDD on Power "Power-No Net" (solid, remove dead copper, pour order 115): 15.219,30.5 21.1,30.5 21.1,26.2 21.1,17.1 21.1,14.9 18.6,14.9 15.202,14.9 15.211,20.311 15.219,25.9
NetC9_C2_2 on Power "Power-C9C1_2" (solid, remove dead copper, pour order 107): 25.1,21.5 26.4,21.5 28.1,19.8 30.4,19.8 30.4,15.6 23.7,15.6 23.7,16.6 24.5,17.4 27.1,17.4 27.1,18.4 25,20.5 25,21.4
NetC9_C3_2 on Power "Power-C9C1_2" (solid, remove dead copper, pour order 109): 5.585,24.7 4.285,24.7 2.585,26.4 0.5,26.4 0.5,30.5 6.985,30.5 6.985,29.6 6.185,28.8 3.585,28.8 3.585,27.8 5.685,25.7 5.685,24.8
NetC9_C1_2 on Power "Power-C9C1_2" (solid, remove dead copper, pour order 110): 25.2,6.4 26.5,6.4 28.2,4.7 30.5,4.7 30.5,0.5 23.8,0.5 23.8,1.5 24.6,2.3 27.2,2.3 27.2,3.3 25.1,5.4 25.1,6.3
NetC9_C4_2 on Power "Power-C9C1_2" (solid, remove dead copper, pour order 108): 5.641,9.65 4.341,9.65 2.641,11.35 0.5,11.35 0.5,15.55 7.041,15.55 7.041,14.55 6.241,13.75 3.641,13.75 3.641,12.75 5.741,10.65 5.741,9.75
NetC7_C4_2 on Power "Power-C7C1_2" (solid, remove dead copper, pour order 104): 5.641,7.85 3.441,7.85 1.641,9.65 0.5,9.65 0.5,10.75 2.841,10.75 4.841,8.75 5.541,8.75 5.641,8.65
NetC3_C4_2 on Power "Power-C3C12" (solid, remove dead copper, pour order 92): 6.941,0.65 6.041,0.65 5.641,0.65 4.341,0.65 1.941,3.05 1.941,5.45 3.241,6.75 5.641,6.75 5.641,5.95 3.941,5.95 3.341,5.35 3.241,5.25 3.241,3.55 5.041,1.75 6.941,1.75
NetC7_C3_2 on Power "Power-C7C1_2" (solid, remove dead copper, pour order 105): 5.585,22.9 3.385,22.9 1.585,24.7 0.5,24.7 0.5,25.8 2.785,25.8 4.785,23.8 5.485,23.8 5.585,23.7
NetC3_C3_2 on Power "Power-C3C12" (solid, remove dead copper, pour order 93): 6.885,15.7 5.985,15.7 5.585,15.7 4.285,15.7 1.885,18.1 1.885,20.5 3.185,21.8 5.585,21.8 5.585,21 3.885,21 3.285,20.4 3.185,20.3 3.185,18.6 4.985,16.8 6.885,16.8
NetC7_C2_2 on Power "Power-C7C1_2" (solid, remove dead copper, pour order 103): 25.1,23.3 27.3,23.3 29.1,21.5 30.4,21.5 30.4,20.4 27.9,20.4 25.9,22.4 25.2,22.4 25.1,22.5
NetC3_C2_2 on Power "Power-C3C12" (solid, remove dead copper, pour order 91): 23.8,30.5 24.7,30.5 25.1,30.5 26.4,30.5 28.8,28.1 28.8,25.7 27.5,24.4 25.1,24.4 25.1,25.2 26.8,25.2 27.4,25.8 27.5,25.9 27.5,27.6 25.7,29.4 23.8,29.4
NetC3_C1_2 on Power "Power-C3C12" (solid, remove dead copper, pour order 94): 23.9,15.4 24.8,15.4 25.2,15.4 26.5,15.4 28.9,13 28.9,10.6 27.6,9.3 25.2,9.3 25.2,10.1 26.9,10.1 27.5,10.7 27.6,10.8 27.6,12.5 25.8,14.3 23.9,14.3
NetC7_C1_2 on Power "Power-C7C1_2" (solid, remove dead copper, pour order 106): 25.2,8.2 27.4,8.2 29.2,6.4 30.5,6.4 30.5,5.3 28,5.3 26,7.3 25.3,7.3 25.2,7.4

## Other copper
Top Layer:
  region net NetC3_C4_2: 5.641,6.75 4.841,6.75 4.841,6.05 5.641,6.05
  region net NetC7_C4_2: 5.641,8.55 4.841,8.55 4.841,7.95 5.641,7.95
  region net NetC9_C4_2: 5.541,10.25 4.741,10.25 4.741,9.85 5.541,9.85
  region net NetQ2_U4_S: 8.541,1.45 7.441,1.45 7.441,0.55 8.541,0.55
  region net NetC3_C3_2: 5.585,21.8 4.785,21.8 4.785,21.1 5.585,21.1
  region net NetC7_C3_2: 5.585,23.6 4.785,23.6 4.785,23 5.585,23
  region net NetC9_C3_2: 5.485,25.3 4.685,25.3 4.685,24.9 5.485,24.9
  region net NetQ2_U3_S: 8.485,16.5 7.385,16.5 7.385,15.7 8.485,15.7
  rectangle net NetC3_C2_2: 25.1,24.4 25.9,25.1
  rectangle net NetC7_C2_2: 25.1,22.6 25.9,23.2
  rectangle net NetC9_C2_2: 25.2,20.9 26,21.3
  rectangle net NetC3_C1_2: 25.2,9.3 26,10
  rectangle net NetC9_C1_2: 25.3,5.8 26.1,6.2
  rectangle net NetC7_C1_2: 25.2,7.5 26,8.1
  rectangle net NetQ2_U1_S: 22.3,14.6 23.4,15.4
  rectangle net GND: 16.9,1.1 18.3,2.3
  rectangle net GND: 15.8,0.9 19.1,1.7
  rectangle net NetD3_2: 15.6,4.2 16.6,4.7
  rectangle net NetQ2_U2_S: 22.2,29.7 23.3,30.5
  region net NetQ2_V4_S: 13.641,5.75 13.641,6.041 14.35,6.75 14.941,6.75 14.941,5.75
  region net NetQ2_V3_S: 13.585,20.8 13.585,21.3 14.085,21.8 14.885,21.8 14.885,20.8
  region net NetQ2_V2_S: 17.1,25.4 17.1,24.9 16.6,24.4 15.8,24.4 15.8,25.4
  region net NetQ2_V1_S: 17.2,10.3 17.2,9.8 16.7,9.3 15.9,9.3 15.9,10.3
Power:
  pour cut-out: 13,31 16,31 16,29.5 13,29.5
Ground:
  pour cut-out: 13,31 13,29.5 16,29.5 16,31
Bottom Layer:
  region net NetC9_C3_2: 6.685,30.5 5.785,30.5 5.785,30 6.685,30
  rectangle net NetC9_C2_2: 24,15.7 24.9,16.2
  rectangle net VDD: 14.9,2.6 16.8,3.2
  rectangle net VDD: 14,1.3 15.6,2.6
  rectangle net NetC9_C1_2: 24.1,0.5 25,1.1
  region net NetC9_C4_2: 6.8,15.45 5.85,15.45 5.85,14.9 6.8,14.9
  rectangle net VBUS: 12.9,13.3 18.3,15.6

## Silkscreen, mask and mechanical layers (free items; w line width, h text height)
Top Solder:
  rectangle: 15.2,22.475 15.45,23.7
  rectangle: 22.525,14.375 23.075,14.525
  rectangle: 7.75,1.5 8.325,1.65
  rectangle: 7.7,16.6 8.275,16.675
  rectangle: 22.425,29.5 22.975,29.625
  rectangle: 14.025,8 14.225,8.55
  region: 13.775,17.45 17.2,17.45 17.2,16.275 17.175,16.25 13.75,16.25
Bottom Solder:
  rectangle: 5.75,23.85 7.075,24.125
  rectangle: 5.8,8.775 7.125,9.1
  rectangle: 23.625,22.025 24.975,22.3
  rectangle: 23.725,6.9 25.075,7.15
  region: 1.125,14.75 1.625,14.25 1.9,14.25 1.9,13.25 1.875,13.225 1.35,13.225 1.35,13.275 1.075,13.55
  region: 29.075,17.925 29.625,17.925 29.85,17.7 29.825,17.675 29.825,16.5 29.4,16.5 28.975,16.925
  region: 1.125,29.775 1.45,29.775 1.95,29.275 1.9,29.225 1.9,28.225 1.4,28.225 0.95,28.675 0.725,28.675
  region: 29.5,2.825 29.825,2.5 29.775,2.45 29.775,1.325 29.575,1.325 29.075,1.825 29.075,2.825
  region: 13.75,17.425 17.55,17.425 17.825,17.15 17.825,16.675 17.725,16.575 17.725,16.45 17.7,16.45 17.475,16.225 17.45,16.25 13.55,16.25 13.2,16.6 13.2,17.075 13.375,17.25
Mechanical 1:
  lines w1.2: -0.6,0 ccw(c0,0) 0,-0.6 ; -0.6,0 ccw(c0,0) 0,-0.6 ; -0.6,0 -0.6,31 ; -0.6,31 cw(c0,31) 0,31.6 ; -0.6,31 cw(c0,31) 0,31.6 ; 0,-0.6 31,-0.6 ; 0,31.6 13.5,31.6 ; 13.5,31.6 cw(c13.5,31) 14.1,31 ; 13.5,31.6 cw(c13.5,31) 14.1,31 ; 14.1,31 14.1,30.6 14.9,30.6 14.9,31 ; 14.9,31 cw(c15.5,31) 15.5,31.6 ; 14.9,31 cw(c15.5,31) 15.5,31.6 ; 15.5,31.6 31,31.6 ; 31,-0.6 ccw(c31,0) 31.6,0 ; 31,-0.6 ccw(c31,0) 31.6,0 ; 31,31.6 cw(c31,31) 31.6,31 ; 31,31.6 cw(c31,31) 31.6,31 ; 31.6,0 31.6,31